# Altium PCB DAPLINK_V0.1.PcbDoc
Units mil, origin at the board's own origin, x right, y up, seen from the top; angles counter-clockwise.
Board outline 2925.03 x 810.03 mil, 2 copper layers (Top Layer, Bottom Layer); 50 components, 45 nets, 167 pads, 93 vias.
Unrouted connection lines stored in the file: 2.
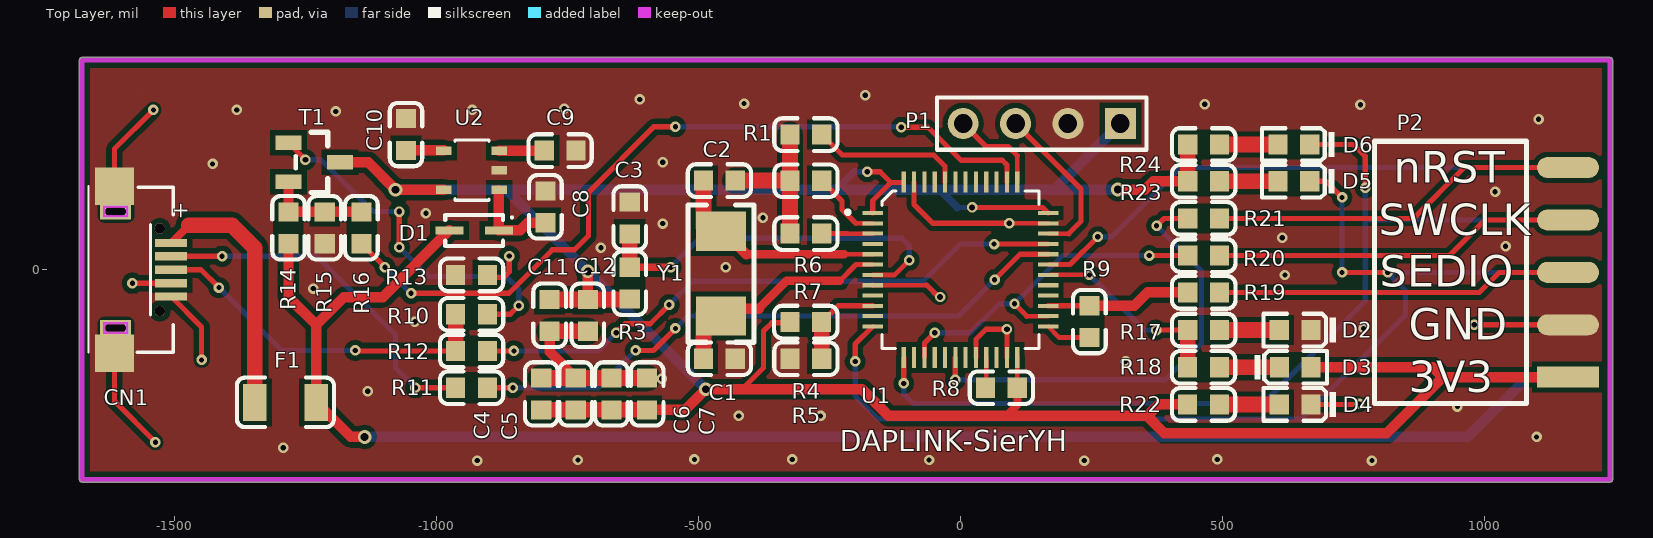
[diagram p0: Top Layer view]
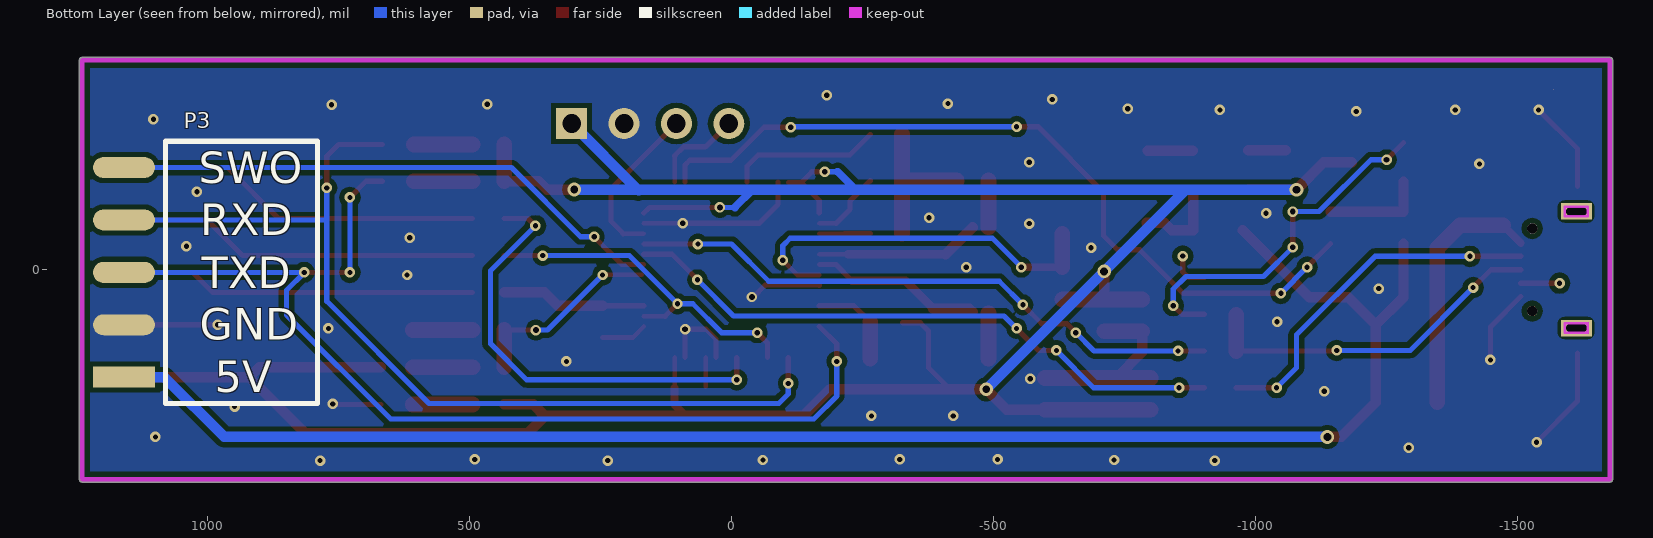
[diagram p1: Bottom Layer view, seen from below]
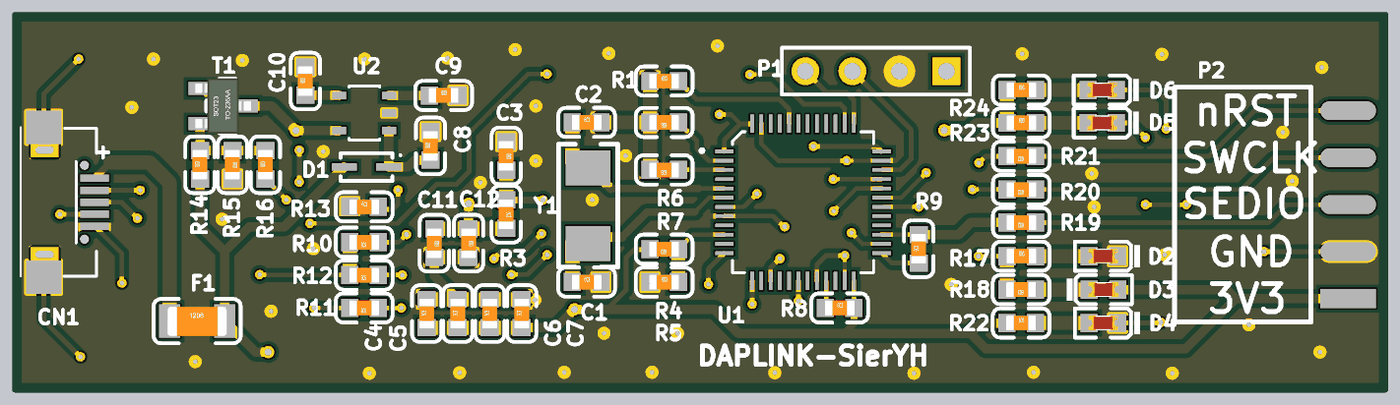
[diagram p2: 3D render of the assembled board from above, using the file's embedded part models]

## Layer stack, top to bottom
Top Solder: solder mask 0.4, Solder Resist, Dk 3.5
Top Layer: signal copper 1.4
Dielectric 1: dielectric 12.6, FR-4, Dk 4.8
Bottom Layer: signal copper 1.4
Bottom Solder: solder mask 0.4, Solder Resist, Dk 3.5

## Board outline
-1676,-405.01 cw(c-1676,-400) -1681.02,-400 -1681.02,400 cw(c-1676,400) -1676,405.01 1239,405.01 cw(c1239,400) 1244.02,400 1244.02,-400 cw(c1239,-400) 1239,-405.01
cut-out: -1569,344

## Design rules (kind name [scope] priority, off if disabled: settings)
Clearance [All] p1: gap=10 ignorepadtopadclearanceinfootprint=FALSE except(0: Arc-Hole Track-Hole SMDPad-Hole THPad-Hole Via-Hole Fill-Hole Poly-Hole Region-Hole Text-Hole)
PolygonConnect [All] p1: connectstyle=Direct reliefconductorwidth=10 reliefentries=4 polygonreliefangle="90 Angle" airgapwidth=10
RoutingVias [All] p1: holewidth=28 width=50 viastyle="Through Hole" minholewidth=28 minwidth=50 maxholewidth=28 maxwidth=50
SolderMaskExpansion [All] p1: expansion=4
Width [All] p1: maxlimit=30 minlimit=8 preferedwidth=10
30 further rules are at their usual default settings.

## Components (designator, comment, footprint, x,y, rotation, side; value= is the part's Value field where it differs from the comment)
C1 "20pF" 0603_C -460,-169.9 r0 top
C2 "20pF" 0603_C -460,170.1 r0 top
C3 "100nF" 0603_C -631,98.79 r270 top
C4 "100nF" 0603_C -800,-237 r90 top
C5 "100nF" 0603_C -734,-237 r90 top
C6 "100nF" 0603_C -666,-237 r90 top
C7 "100nF" 0603_C -598,-237 r90 top
C8 "1uF" 0603_C -792,120 r90 top
C9 "100nF" 0603_C -764,227.4 r0 top
C10 "10nF" 0603_C -1058,258 r90 top
C11 "1uF" 0603_C -784,-87 r270 top
C12 "100nF" 0603_C -711,-87 r270 top
CN1 "U-F-M5DW-Y-2" MICRO-USB -1592.61,0 r270 top
D1 "BAT60JFILM" SOD-323 -928,75 r0 top
D2 "红灯 0603" 0603_LED_S1 638.37,-115 r180 top
D3 "绿灯 0603" 0603_LED_S1 638.69,-186 r0 top
D4 "红灯 0603" 0603_LED_S1 638.37,-257 r180 top
D5 "黄灯 0603" 0603_LED_S1 636,169 r180 top
D6 "黄灯 0603" 0603_LED_S1 636,239 r180 top
F1 "FUSE_500MA" 1206_C -1288,-253 r0 top
P1 "Header 4" HDR1X4 305,279 r180 top
P2 "Header 5" HDR2.54-M-WS-5P-2D 1159,-5 r90 top
P3 "Header 5" HDR2.54-M-WS-5P-2D 1159,-5 r90 bottom
R1 "100K" 0603_C -295,258 r0 top value=10K
R3 "100K" 0603_C -631,-25.58 r270 top value=10K
R4 "4K7" 0603_C -295.32,-99.9 r180 top value=10K
R5 "4K7" 0603_C -295,-169.9 r0 top value=10K
R6 "10K" 0603_C -295,170 r180 top
R7 "10K" 0603_C -295,69 r180 top
R8 "10K" 0603_C 78,-225 r0 top
R9 "100R" 0603_C 246,-99 r90 top value=10K
R10 "1K5" 0603_C -933,-85 r180 top value=10K
R11 "0" 0603_C -933,-225 r180 top value=10K
R12 "0" 0603_C -933,-155 r180 top value=10K
R13 "100K" 0603_C -933,-9.84 r0 top value=10K
R14 "10K" 0603_C -1282.21,80 r90 top
R15 "36K" 0603_C -1213,80 r270 top value=10K
R16 "100R" 0603_C -1143,80 r90 top value=10K
R17 "1K" 0603_C 464,-115 r0 top value=10K
R18 "1K" 0603_C 463.69,-186 r180 top value=10K
R19 "22R" 0603_C 464,-43.21 r180 top value=10K
R20 "22R" 0603_C 464,27 r180 top value=10K
R21 "22R" 0603_C 464,98 r180 top value=10K
R22 "1K" 0603_C 463.69,-257 r0 top value=10K
R23 "2K" 0603_C 464,169 r0 top value=10K
R24 "2K" 0603_C 464,239 r0 top value=10K
T1 "9013" SOT-23(SOT-23-3) -1233,205 r180 top
U1 "STM32F103CBT6" LQFP48_0R5_7x7 0,0 r270 top
U2 "LD3985M33R" SOT23-5L -933,190 r180 top
Y1 "8MHz ±20ppm 20pF" SMD-5032_2P -457,-7.29 r270 top

## Footprints (in the part's own frame and the unit in brackets; to place one, negate y for a bottom-side part, rotate by r counter-clockwise, add the part's x,y. Pads: shape width x height; smd on the part's side, far side on the other; paste and mask are expansions set on the pad)
0603_C [mm]
  rect 0.93x0.98 smd: 1(-0.77,0) 2(0.77,0)
  silkscreen extent -1.53,-0.79 1.54,0.79, body extent -0.8,-0.4 0.8,0.4, height 0.3
0603_LED_S1 [mm]
  rect 0.93x0.98 smd: A(0.77,0) K(-0.77,0)
  silkscreen extent -1.98,-0.79 1.54,0.79, body extent -0.8,-0.4 0.8,0.4, height 0.6
1206_C [mm]
  rect 1.13x1.8 smd: 1(-1.49,0) 2(1.49,0)
  silkscreen extent -2.36,-1.2 2.35,1.2, body extent -1.6,-0.81 1.6,0.79, height 1
HDR1X4 [mm] "Connector; Header; 4 Position"
  rect 1.5x1.5 hole 0.9: 1(0,0)
  round 1.5 hole 0.9: 2(2.54,0) 3(5.08,0) 4(7.62,0)
  silkscreen extent -1.27,-1.27 8.89,1.27
HDR2.54-M-WS-5P-2D [mm] "5P卧式贴片排母2.54"
  rect 1.02x3 smd: 1(-5.08,0)
  oval 1.02x3 smd: 2(-2.54,0) 3(0,0) 4(2.54,0) 5(5.08,0)
  silkscreen extent -6.35,2.01 6.35,9.37
LQFP48_0R5_7x7 [mm] "Low & medium-density value line, advanced ARM-based 32-bit MCU"
  rect 0.2x1 smd: 1(-2.75,-4.25) 2(-2.25,-4.25) 3(-1.75,-4.25) 4(-1.25,-4.25) 5(-0.75,-4.25) 6(-0.25,-4.25) 7(0.25,-4.25) 8(0.75,-4.25) 9(1.25,-4.25) 10(1.75,-4.25) 11(2.25,-4.25) 12(2.75,-4.25) 25(2.75,4.25) 26(2.25,4.25) 27(1.75,4.25) 28(1.25,4.25) 29(0.75,4.25) 30(0.25,4.25) 31(-0.25,4.25) 32(-0.75,4.25) 33(-1.25,4.25) 34(-1.75,4.25) 35(-2.25,4.25) 36(-2.75,4.25)
  rect 1x0.2 smd: 13(4.25,-2.75) 14(4.25,-2.25) 15(4.25,-1.75) 16(4.25,-1.25) 17(4.25,-0.75) 18(4.25,-0.25) 19(4.25,0.25) 20(4.25,0.75) 21(4.25,1.25) 22(4.25,1.75) 23(4.25,2.25) 24(4.25,2.75) 37(-4.25,2.75) 38(-4.25,2.25) 39(-4.25,1.75) 40(-4.25,1.25) 41(-4.25,0.75) 42(-4.25,0.25) 43(-4.25,-0.25) 44(-4.25,-0.75) 45(-4.25,-1.25) 46(-4.25,-1.75) 47(-4.25,-2.25) 48(-4.25,-2.75)
  silkscreen extent -3.81,-5.52 3.81,3.81, body extent -3.5,-3.5 3.5,3.5, height 1.6
MICRO-USB [mm]
  rect 0.4x1.55 smd: 1(-1.3,2.2) 2(-0.65,2.2) 3(0,2.2) 4(0.65,2.2) 5(1.3,2.2)
  rect 1.8x1.9 smd: 6(-4.05,-0.55) 6(4.05,-0.55)
  rect 0.8x1.5 hole 0.4 slot 1 at 90 deg: 6(-2.825,-0.5) 6(2.825,-0.5)
  round 0.5 hole 0.5 unplated: ""(-2,1.65) ""(2,1.65)
  Keep-Out Layer lines w0.127: 3.054,-1.043 2.596,-1.043 2.596,0.075 3.054,0.075 3.054,-1.043 ; -2.596,-1.043 -3.054,-1.043 -3.054,0.075 -2.596,0.075 -2.596,-1.043
  silkscreen extent -4.05,-1.8 4,2.3
SMD-5032_2P [mm]
  rect 1.9x2.4 smd: 1(-2.05,0) 2(2.05,0)
  silkscreen extent -3.32,-1.6 3.32,1.6
SOD-323 [mm] "Diode"
  rect 1.35x0.4 smd: 1(-1.2,0) 2(1.2,0)
  silkscreen extent -1.4,-0.75 1.88,0.75, body extent -1.35,-0.72 1.35,0.72, height 1.17
SOT23-5L [mil] "Enhanced single channel power switches"
  rect 30x16 smd: 1(-53.15,37.4) 2(-53.15,0) 3(-53.15,-37.4) 4(53.15,-37.4) 5(53.15,37.4)
  silkscreen extent -33,-58 32,57, body extent -34,-59 34,59, height 57
SOT-23(SOT-23-3) [mm]
  rect 1.25x0.7 smd: 1(1.25,-0.95) 2(1.25,0.95) 3(-1.25,0)
  silkscreen extent -0.65,-1.46 0.9,1.46, body extent -1.5,-1.5 1.5,1.5, height 1.3

## Part data
C1 C2: library part Cap, "Capacitor  0603 20pF", LatestRevisionDate=17-Jul-2002, LatestRevisionNote="Re-released for DXP Platform.", PackageDescription="Radial Cap, Thru-Hole; 2 Leads; 0.3 in Pin Spacing", PackageReference=RAD-0.3, Published=8-Jun-2000, Publisher="Altium Limited"
C3: library part Cap, "Capacitor  0603 100nF", LatestRevisionDate=17-Jul-2002, LatestRevisionNote="Re-released for DXP Platform.", PackageDescription="Radial Cap, Thru-Hole; 2 Leads; 0.3 in Pin Spacing", PackageReference=RAD-0.3, Published=8-Jun-2000, Publisher="Altium Limited"
C4 C5 C12: library part Cap, "Capacitor  0603  100nF", LatestRevisionDate=17-Jul-2002, LatestRevisionNote="Re-released for DXP Platform.", PackageDescription="Radial Cap, Thru-Hole; 2 Leads; 0.3 in Pin Spacing", PackageReference=RAD-0.3, Published=8-Jun-2000, Publisher="Altium Limited"
C6 C7 C9: library part Cap, "Capacitor 0603 100nF", LatestRevisionDate=17-Jul-2002, LatestRevisionNote="Re-released for DXP Platform.", PackageDescription="Radial Cap, Thru-Hole; 2 Leads; 0.3 in Pin Spacing", PackageReference=RAD-0.3, Published=8-Jun-2000, Publisher="Altium Limited"
C8 C11: library part Cap, "Capacitor 0603 1uF", LatestRevisionDate=17-Jul-2002, LatestRevisionNote="Re-released for DXP Platform.", PackageDescription="Radial Cap, Thru-Hole; 2 Leads; 0.3 in Pin Spacing", PackageReference=RAD-0.3, Published=8-Jun-2000, Publisher="Altium Limited"
C10: library part Cap, "Capacitor  0603  10nF", LatestRevisionDate=17-Jul-2002, LatestRevisionNote="Re-released for DXP Platform.", PackageDescription="Radial Cap, Thru-Hole; 2 Leads; 0.3 in Pin Spacing", PackageReference=RAD-0.3, Published=8-Jun-2000, Publisher="Altium Limited"
CN1: library part "USB-MICRO-typeB connector_1", "USB-Micro-typeB connector", Manuf_Part_1=5075BMR-05-SM, ECCN=????, Order=5075BMR-05-SM
D1: Manuf_1=STM, Distrib=ST, ECCN_US/EU=EAR99/NEC, Manuf_Part_1=BAT60JFILM, Order=BAT60JFILM, Provided=ST, Revision="July-2002: Re-released for DXP Platform."
D2 D4: library part "0603 红灯", "发光二极管", Package=0603, SuppliersPartNumber=C2286, ComponentLink1Description=¹©Ó, ComponentLink1URL=http://www.szlcsc.com/product/details_2659.html, Supplier=LC
D3: library part "0603 绿灯", "发光二极管", Package=0603, SuppliersPartNumber=C72043, ComponentLink1Description=¹©Ó, ComponentLink1URL=http://www.szlcsc.com/product/details_73152.html, Supplier=LC
D5 D6: library part "0603 黄灯", "发光二极管", Package=0603, SuppliersPartNumber=C72038, ComponentLink1Description=¹©Ó, ComponentLink1URL=http://www.szlcsc.com/product/details_73147.html, Supplier=LC
F1: library part "Fuse 2", "自恢复保险丝_SMD1206_500ma", LatestRevisionDate=17-Jul-2002, LatestRevisionNote="Re-released for DXP Platform.", PackageDescription="Thru-Hole; 2 Leads", PackageReference=PIN-W2/E2.8, Published=8-Jun-2000, Publisher="Altium Limited"
P1: "Header, 4-Pin", LatestRevisionDate=17-Jul-2002, LatestRevisionNote="Re-released for DXP Platform.", Publisher="Altium Limited"
P2 P3: "Header, 5-Pin", LatestRevisionDate=17-Jul-2002, LatestRevisionNote="Re-released for DXP Platform.", Publisher="Altium Limited"
R1: library part Resistor_ST, "Resistor 0603"
R3 R4 R5 R6 R7 R8 R9 R10 R11 R12 R13 R14 R15 R16 R17 R18 R19 R20 R21 R22 R23 R24: library part Resistor_ST, "Resistor  0603"
T1: library part NPN, "NPN Bipolar Transistor", Code - JEDEC=TO-226-AA, Published=8-Jun-2000, Publisher="Altium Limited", Revision="July-2002: Re-released for DXP Platform."
U1: "Medium-density performance line ARM-based 32-bit MCU with 128KB Flash", Manuf_1=STM, Manuf_Part_1=STM32F103C8T6, Distrib=ST, ECCN_US/EU=3A991A2/NEC, Order=STM32F103C8T6, Provided=ST, Ref St=9175981
U2: "Ultra low drop-low noise BiCMOS voltage, regulators low ESR capacitors compatible", Manuf_1=STM, Distrib=ST, ECCN_US/EU=EAR99/NEC, Manuf_Part_1=LD3985M33R, Order=LD3985M33R, Provided=ST, Ref St=9176161
Y1: library part "SMD-5032_2P 8MHz 20ppm 20pF", "贴片晶振", Package=SMD-5032_2P, SuppliersPartNumber=C115962, ComponentLink1Description=¹©Ó, ComponentLink1URL=http://www.szlcsc.com/product/details_117214.html, Supplier=LC

## Via types
v1: diameter 20, hole 10, Top Layer to Bottom Layer, 75 vias
v2: diameter 20, hole 11, Top Layer to Bottom Layer, 13 vias
v3: diameter 26, hole 15, Top Layer to Bottom Layer, 5 vias

## Nets (pads, with @x,y where several pads share a name; then routed paths per layer and width w, separated by ;. In a path a pad name is that pad's centre, name@x,y a point inside that pad or via, vN(x,y) a via of type N, cw(c..) or ccw(c..) an arc to the next point about the centre after c; other vN are vias at no path point)
3V3: C4.1 C5.1 C6.1 C7.1 C11.1 C12.1 D3.A P1.1 P2.1 R3.2 R4.2 R8.2 R22.1 R23.1 R24.1 T1.3 U1.1 U1.9 U1.24 U1.36 U1.48 U2.5 | length 5883.5
  Top Layer w9: R8.2 U1.24
  Top Layer w10: -416,-227 -376,-187 -376,-117 -360,-101 R4.2@-326.73,-101 ; v2(-178,187) -153.35,187 -133,166.65 ; U1.1 -167.32,132.32 -133,166.65 ; U1.48@-108.94,166.65 -133,166.65 ; v2(22,119) 156.59,119 U1.36
  Top Layer w15: 87,-279 108.66,-257.34 R8.2@108.66,-225.34
  Top Layer w20: T1.3 -1130.4,205 v3(-1078,152.6) U2.5 ; C12.1 v3(-711,-3) ; C7.1 -525.32,-267.32 v3(-486,-228) -188,-228 -137,-279 87,-279 356,-279 ; v3(300,153) 351.4,153 367.4,169 R23.1 ; R22.1 378,-257 356,-279 ; D3.A 901,-186 920,-205 ; P2.1 920,-205 ; 356,-279 389,-312 813,-312 920,-205
  Top Layer w30: C4.1 C5.1 C6.1 C7.1 ; C11.1 C12.1 R3.2@-631.79,-56.68 ; R23.1 R24.1
  Bottom Layer w10: -202.6,187 v2(-178,187) ; -6.4,119 v2(22,119)
  Bottom Layer w15: -237,152.6 -202.6,187 ; -40,152.6 -6.4,119
  Bottom Layer w20: v3(-1078,152.6) -866.6,152.6 ; v3(-486,-228) v3(-711,-3) -866.6,152.6 ; 177.3,151.3 178.6,152.6 ; v3(300,153) 179,153 ; P1.1 179,153 ; -866.6,152.6 -237,152.6 -40,152.6 178.6,152.6 ; 178.6,152.6 179,153
BOOT0: R1.2 U1.44 | length 290.4
  Top Layer w10: R1.2 -225.68,219 -51,219 -29.53,197.53 U1.44
GND: C1.2 C2.2 C3.1 C4.2 C5.2 C6.2 C7.2 C8.2 C9.2 C10.2 C11.2 C12.2 CN1.5 CN1.6 D2.K D4.K P1.2 P2.2 P3.2 R1.1 R5.1 R6.2 R7.2 R13.1 R15.2 U1.8 U1.20 U1.23 U1.35 U1.47 U2.2 | length 2079.4
  Top Layer w9: U1.8@-167.14,-29.34 -64.34,-29.34 ; U1.23 v2(88.58,-113.58) ; v2(93,88.58) U1.35
  Top Layer w10: CN1.6@-1614.27,-159.45 -1614.27,-250.73 v1(-1536,-329) ; CN1.6@-1614.27,159.45 -1614.27,230.73 v1(-1540,305) ; CN1.5 -1448,-109.18 v1(-1448,-172) ; U1.8 U1.8@-167.14,-29.34 ; U1.47 -88.58,124.58 -52.58,88.58 v2(93,88.58) ; -64.34,-29.34 -41.69,-52 v2(-39,-52) ; U1.20 29.53,-132.47 48.42,-113.58 v2(88.58,-113.58) ; D4.K v1@761,-257 ; v2(980,-105) P2.2
  Top Layer w20: C11.2 -784,-156.68 C5.2
  Top Layer w30: C4.2 C5.2 C6.2 C7.2 ; C11.2 C12.2 ; C2.2 -325.42,170.1 R1.1@-325.42,257.9 ; R7.2 R6.2
  other v1: -922,-364 236,-364 785,-364 -730,-363 -60,-363 -507.67,-362 -321,-362 490,-362 -1292,-339.39 1099,-319 -423,-279 -267,-279 948,-261 761,-256 -1131,-232 -570,-208 315,-175 769,-112 -1041,-99 -1235,-36 619,-10 -448,5 -686,42 1040,45 614,61 -568,88 -377,99 -1020,108 1020,149 -1427,202 -568,205 1103,287 -1192,302 -1381,305 -932,305 -756,307 763,315 466,316 -413,317 -612,325 -182,333
MCO: U1.29
NetC8_1: C8.1 D1.2 U2.1 | length 171.5
  Top Layer w20: U2.1@-880.76,151.69 D1.2 -840,75 -825.32,89.68 C8.1
NetC9_1: C9.1 U2.3 | length 85.5
  Top Layer w20: U2.3 C9.1
NetC10_1: C10.1 U2.4 | length 71.6
  Top Layer w20: C10.1 U2.4@-986.43,227.68
NetCN1_1: CN1.1 F1.1 | length 486
  Top Layer w15: CN1.1 -1472.18,85
  Top Layer w30: -1472.18,85 -1390,85 -1346.66,41.66 F1.1
NetCN1_2: CN1.2 R11.2 | length 683.4
  Top Layer w10: CN1.2 v1(-1409,25.59) ; v1(-1040,-225) R11.2
  Bottom Layer w10: v1(-1409,25.59) -1227.59,25.59 -1078,-124 -1078,-187 v1(-1040,-225)
NetCN1_3: CN1.3 R10.2 R12.2 | length 674.5
  Top Layer w10: CN1.3 -1449,0 v1(-1415,-34) ; v1@-1154,-155 R12.2
  Top Layer w30: R12.2 R10.2@-963.32,-86
  Bottom Layer w10: v1(-1415,-34) -1295,-154 v1(-1155,-154)
NetCN1_4: CN1.4 R13.2 | length 150.2
  Top Layer w10: v1(-1580,-25.59) CN1.4 ; R13.2@-902.68,-15 -872,-15 -861,-4 v1(-861,26)
NetD2_A: D2.A R17.2 | length 113.7
  Top Layer w30: R17.2 D2.A
NetD3_K: D3.K R18.1 | length 114.4
  Top Layer w30: R18.1 D3.K
NetD4_A: D4.A R22.2 | length 114.1
  Top Layer w30: R22.2 D4.A
NetD5_A: D5.A R23.2 | length 111.4
  Top Layer w30: R23.2 D5.A
NetD6_A: D6.A R24.2 | length 111.4
  Top Layer w30: R24.2 D6.A
NetP2_3: P2.3 R19.1 | length 680.5
  Top Layer w10: R19.1 989.79,-43.21 1028,-5 P2.3
NetP2_4: P2.4 R20.1 | length 692.9
  Top Layer w10: R20.1 933,27 1001,95 P2.4
NetP2_5: P2.5 R21.1 | length 704.9
  Top Layer w10: R21.1 864,98 961,195 P2.5
NetR8_1: R8.1 U1.21 | length 56.1
  Top Layer w9: R8.1@49.21,-223.47 U1.21
NetR10_1: R10.1 T1.1 | length 693
  Top Layer w10: T1.1 -1282.21,242.21 v2(-1250,210) ; v2(-1071,43) v2(-1071,111) ; R10.1 -859.32,-85 v2(-843,-68.68)
  Bottom Layer w10: v2(-1250,210) -1220,210 -1121,111 v2(-1071,111) ; v2(-1071,43) -1015,-13 -867,-13 -843,-37 v2(-843,-68.68)
NetR14_2: R14.2 R15.1 R16.2 T1.2 | length 196.5
  Top Layer w20: T1.2 R14.2 R15.1 R16.2
OSC32_IN: R7.1 U1.3 | length 97.3
  Top Layer w9: -215.9,68.9 U1.3
  Top Layer w10: R7.1 -216,69
OSC_IN: C2.1 U1.5 Y1.1 | length 402.9
  Top Layer w9: -222,29.53 U1.5
  Top Layer w16: -408.72,29.53 -222,29.53
  Top Layer w20: Y1.1@-460,80.81 -408.72,29.53
  Top Layer w30: Y1.1@-490.32,81.13 C2.1
OSC_OUT: C1.1 U1.6 Y1.2 | length 417.1
  Top Layer w9: -199.16,9.84 U1.6
  Top Layer w10: -230,-21 -199.16,9.84
  Top Layer w16: -385,-74 -332,-21 -230,-21
  Top Layer w20: Y1.2@-460,-80.61 -453.39,-74 -385,-74
  Top Layer w30: C1.1 Y1.2@-490.32,-82.92
PWR_ENn: U1.28
STM_JTCK: P1.4 U1.37 | length 179.1
  Top Layer w9: U1.37 108.27,217.73
  Top Layer w10: P1.4 49.53,234.47 91.53,234.47 108.27,217.73
STM_JTMS: P1.3 U1.34 | length 310.7
  Top Layer w9: U1.34 206.43,68.9
  Top Layer w10: P1.3 230,154 230,92.47 206.43,68.9
STM_NRST: C3.2 R3.1 U1.7 | length 734.4
  Top Layer w9: U1.7 -125.84,-9.84 v2(-98,18)
  Top Layer w15: R3.1 v2(-553,4.73)
  Top Layer w30: R3.1 C3.2
  Bottom Layer w10: v2(-553,4.73) -553,5 -498,60 -112,60 -98,46 v2(-98,18)
T_JTCK: R20.2 U1.15 U1.26 | length 673.2
  Top Layer w9: 126.58,-88.58 U1.26
  Top Layer w10: U1.15 -68.9,-139.9 v1(-49,-120) ; v1(103,-65) 126.58,-88.58 ; v1(360,27) R20.2
  Bottom Layer w10: v1(-49,-120) 19,-120 74,-65 v1(103,-65) 195,27 v1(360,27)
T_JTDI: U1.17
T_JTDO: U1.16
T_JTMS/SWDIO_OUT: R9.2 R19.2 U1.27 | length 276.7
  Top Layer w10: U1.27 R9.2@245.79,-68.9
  Top Layer w20: R9.2 331.53,-68.68 357,-43.21 R19.2
T_NRST: R21.2 U1.18 | length 867.2
  Top Layer w10: v1@-9.84,-209.84 U1.18 ; v1(374,84) 388,98 R21.2
  Bottom Layer w10: v1(-10,-210) 391,-210 460,-141 460,-2 v1(374,84)
T_SWDIO_IN: R9.1 U1.25 | length 87.4
  Top Layer w9: U1.25 188.37,-129.32
  Top Layer w10: 188.37,-129.32 R9.1
T_SWO: P3.5 U1.31 | length 1068.4
  Top Layer w9: U1.31 208.84,9.84
  Top Layer w10: 208.84,9.84 v1(262,63)
  Bottom Layer w10: v1(262,63) 288,63 420,195 P3.5
T_UART_CTS: R4.1 R5.2 U1.10 | length 180.2
  Top Layer w10: R4.1 -234,-68.9 U1.10
  Top Layer w30: R5.2@-265,-169.58 R4.1
T_UART_RXD: D6.K P3.4 U1.13 | length 1817
  Top Layer w10: v1(-108.27,-217) U1.13 ; D6.K 750,239 772,217 v1(772,156)
  Bottom Layer w10: v1(-108.27,-217) -108.27,-237 -90.27,-255 577,-255 772,-60 v1(772,156) ; 772,95 P3.4
T_UART_TXD: D5.K P3.3 U1.12 | length 2040.9
  Top Layer w10: v1(-201,-175) -201,-141.94 U1.12 ; D5.K 697,169 v1(728,138) ; v1(728,-5) v1(815,-5)
  Bottom Layer w10: v1(-201,-175) -201,-241 -157,-285 650,-285 849,-86 849,-39 v1(815,-5) P3.3 ; v1(728,-5) v1(728,138)
TAMPER_RTC: R6.1 U1.2 | length 140.6
  Top Layer w9: -199.58,88.58 U1.2
  Top Layer w10: R6.1 -226,131.32 -226,115 -199.58,88.58
U5V: D1.1 F1.2 P3.1 R14.1 | length 3116.1
  Top Layer w20: R14.1 -1282.21,-52.13 -1229.34,-105 ; v3(-1137,-319) -1163.34,-319 F1.2 -1229.34,-105 ; D1.1 -1102.37,-52.13 -1176.46,-52.13 -1229.34,-105
  Bottom Layer w20: v3(-1137,-319) 968,-319 1082,-205 P3.1
"USB RENUMn": R16.1 U1.38 | length 1513.9
  Top Layer w9: U1.38 88.58,200
  Top Layer w10: R16.1 v1(-1098.32,5) ; v1(-1048.32,-45) -862,-45 -779,38 -737,38 -710,65 -710,147.68 -584.68,273 v1(-544,273) ; v1(-113,272) -62,272 1,209 79.58,209 88.58,200
  Bottom Layer w10: v1(-1098.32,5) v1(-1048.32,-45) ; v1(-544,273) -114,273 v1(-113,272)
USB_DM: R11.1 U1.32 | length 1175.4
  Top Layer w10: R11.1 v1(-854,-225) ; v1(-620,-154) -586,-154 v1(-544,-112) ; v1(65,-19) 113.53,29.53 U1.32
  Bottom Layer w10: v1(-854,-225) -691,-225 v1(-620,-154) ; v1(-544,-112) -520,-88 -4,-88 v1(65,-19)
USB_DP: R12.1 U1.33 | length 1154.6
  Top Layer w9: v1(64,49) 64.21,49.21 U1.33
  Top Layer w10: R12.1 v1(-852,-155) ; v1(-657,-120) -640,-103 -592,-103 v1(-556,-67)
  Bottom Layer w10: v1(-852,-155) -692,-155 v1(-657,-120) ; v1(-556,-67) -511,-22 -71,-22 0,49 v1(64,49)
USB_status_LED: R17.1 R18.2 U1.30 | length 376.8
  Top Layer w9: U1.30@171.07,-9.59 171.14,-9.66 v1@246,-9.66
  Top Layer w10: v2(373,-115) R17.1
  Top Layer w30: R18.2@433.68,-185.69 R17.1
  Bottom Layer w10: v1(246,-10) 351,-115 v2(373,-115)
pads on no net: CN1. U1.4 U1.11 U1.14 U1.19 U1.22 U1.39 U1.40 U1.41 U1.42 U1.43 U1.45 U1.46

## Polygon pours and split planes (outlines as drawn)
GND on Bottom Layer "Bottom_Layer_GND" (solid, pour order 6): -1676,400 -1676,-400 1239,-400 1239,400
GND on Top Layer "Top_Layer_GND" (solid, pour order 8): -1676,400 -1676,-400 1239,-400 1239,400

## Keep-outs
Keep-Out Layer:
  lines w10: -1676,-400 1239,-400 1239,400 -1676,400 -1676,-400

## Silkscreen, mask and mechanical layers (free items; w line width, h text height)
Top Overlay:
  text "nRST" at 827,166 h60
  text "SWCLK" at 798,66 h60
  text "SEDIO" at 800,-32 h60
  text "GND" at 855,-134 h60
  text "3V3" at 855,-233.5 h60
  text "DAPLINK-SierYH" at -230,-346 h40
Bottom Overlay:
  text "SWO" at 1016,165 h60
  text "RXD" at 1014,66 h60
  text "TXD" at 1011,-35 h60
  text "GND" at 1015,-134 h60
  text "5V" at 986,-234 h60

## Text inside footprints (layer, text, board x,y; h text height)
CN1: Top Overlay "+" at -1500.1,129.92 h30 r270